# Altium PCB PCB1.PcbDoc
Units mm, origin at the board's own origin, x right, y up, seen from the top; angles counter-clockwise.
Board outline 80.77 x 44.7 mm, 2 copper layers (Top Layer, Bottom Layer); 14 components, 27 nets, 76 pads, 18 vias.
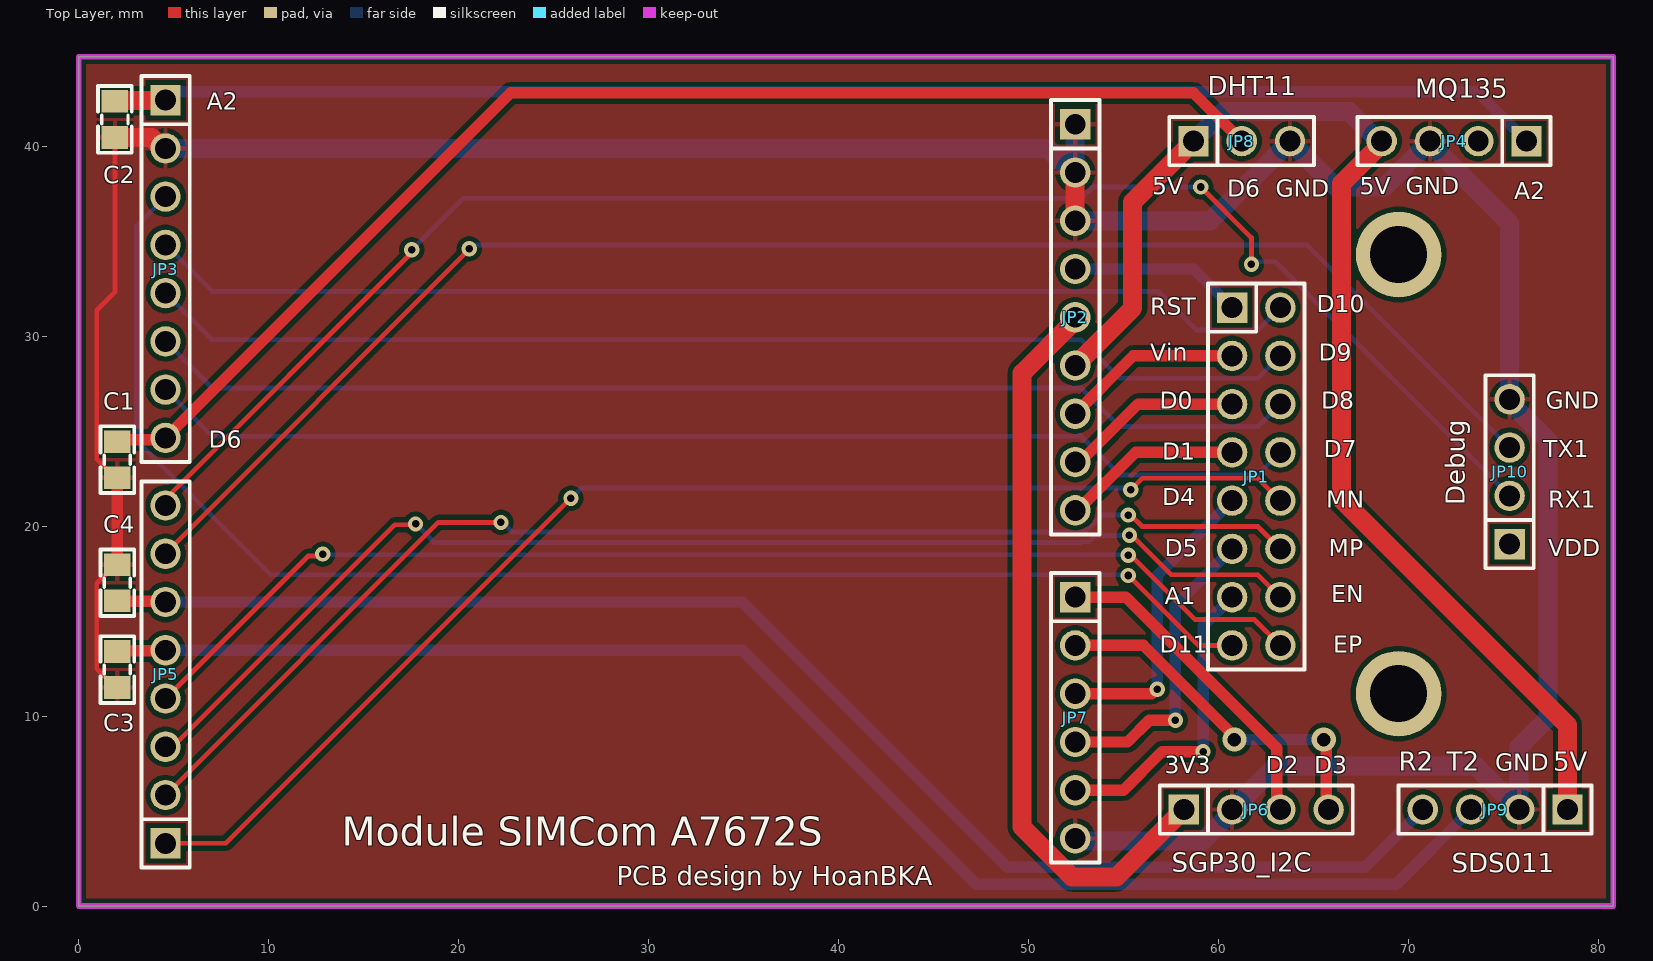
[diagram p0: Top Layer view]
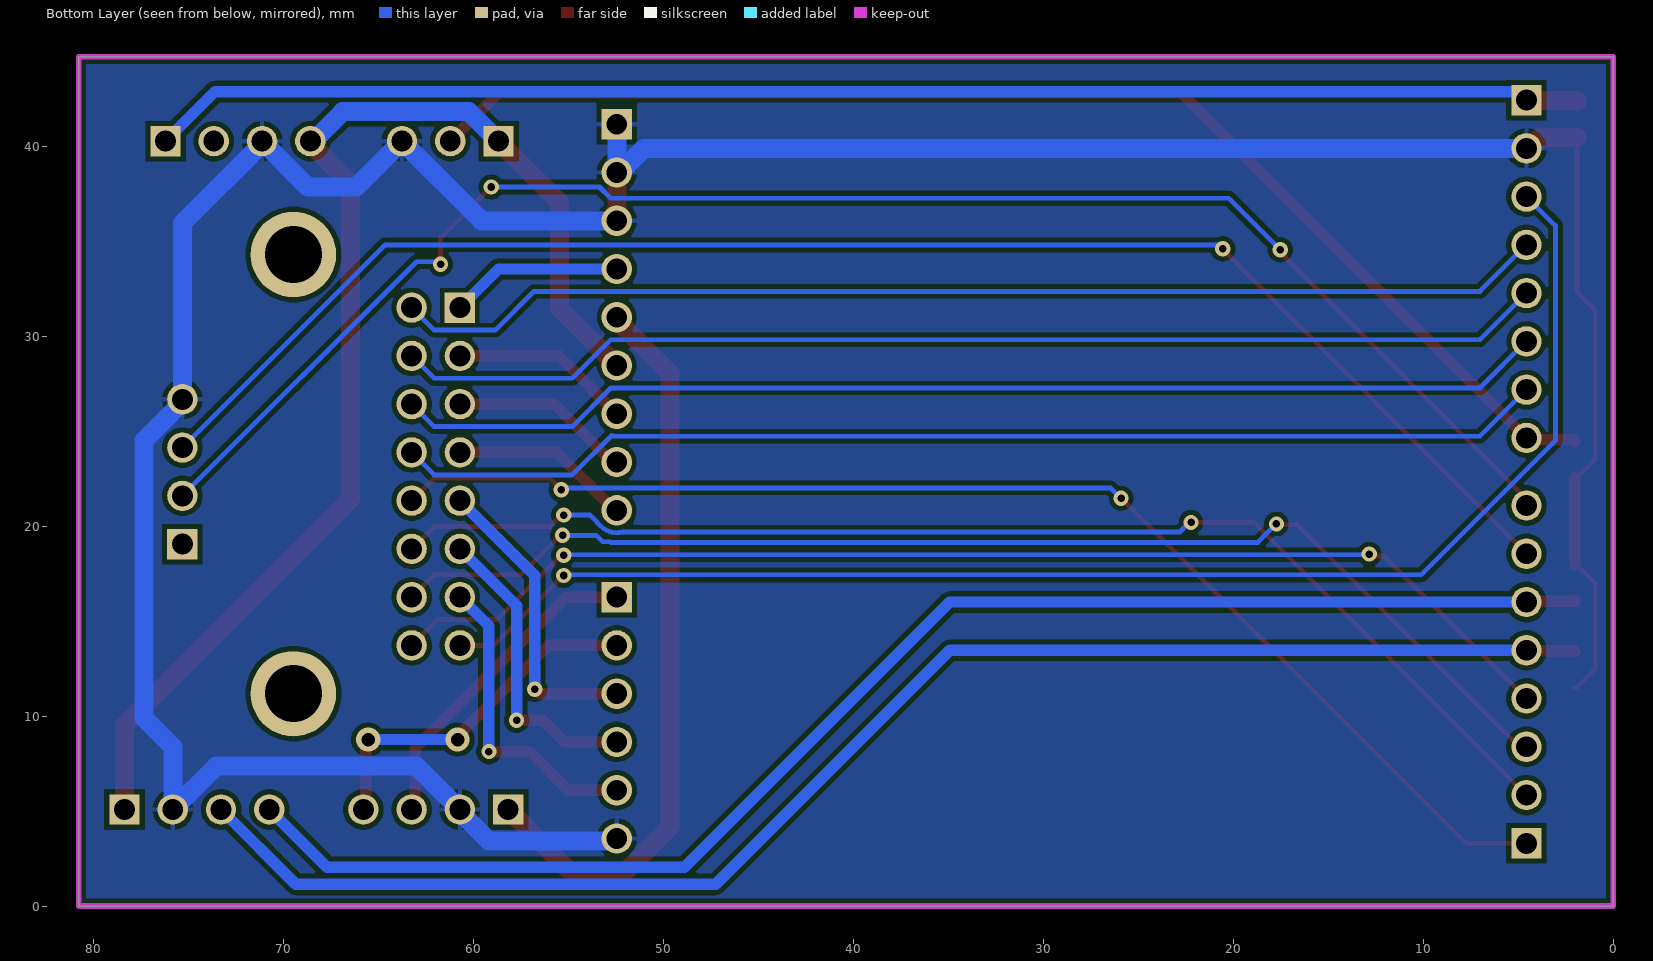
[diagram p1: Bottom Layer view, seen from below]
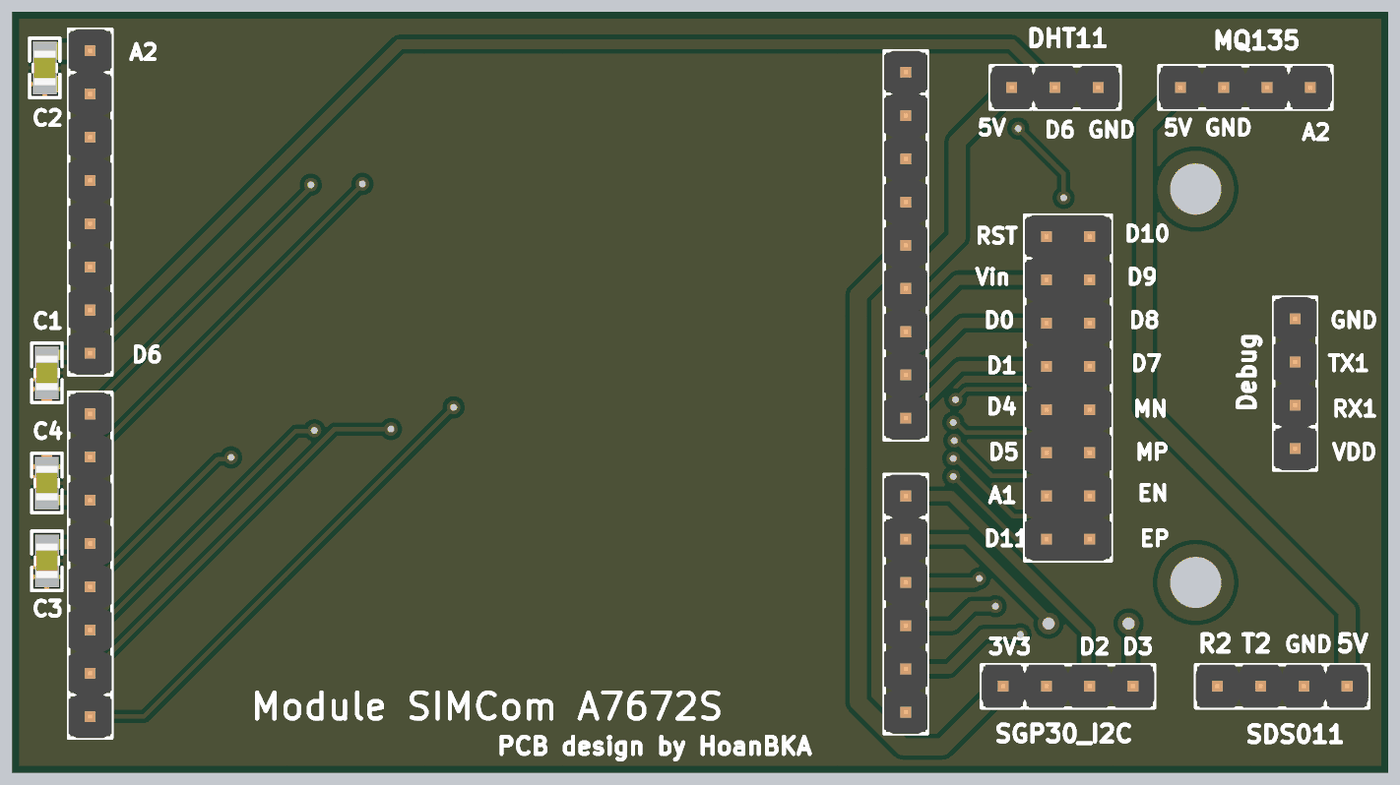
[diagram p2: 3D render of the assembled board from above, using the file's embedded part models]

## Layer stack, top to bottom
Top Solder: solder mask 0.0102, Solder Resist, Dk 3.5
Top Layer: signal copper 0.0356
Dielectric 1: dielectric 0.32, FR-4, Dk 4.8
Bottom Layer: signal copper 0.0356
Bottom Solder: solder mask 0.0102, Solder Resist, Dk 3.5

## Board outline
0,0 80.772,0 80.772,44.704 0,44.704

## Design rules (kind name [scope] priority, off if disabled: settings)
Clearance [All] p1: gap=0.254 ignorepadtopadclearanceinfootprint=FALSE except(0: Arc-Hole Track-Hole SMDPad-Hole THPad-Hole Via-Hole Fill-Hole Poly-Hole Region-Hole Text-Hole)
HoleSize [All] p1: absolutevalues=TRUE maxlimit=5 minlimit=0.025 maxpercent=80.000 minpercent=20.000
MinimumSolderMaskSliver [All] p1: minsoldermaskwidth=0
PolygonConnect [All] p1: connectstyle=Relief reliefconductorwidth=0.254 reliefentries=4 polygonreliefangle="90 Angle" airgapwidth=0.254
RoutingVias [All] p1: holewidth=0.4 width=0.8 viastyle="Through Hole" minholewidth=0.2 minwidth=0.4 maxholewidth=0.711 maxwidth=1.28
SilkToSilkClearance [All] p1: silktosilkclearance=0
SilkToSolderMaskClearance [IsPad] p1: minsilkscreentomaskgap=0 clearancetoexposedcopper=TRUE
SolderMaskExpansion [All] p1: expansion=0.102 istentingtop=FALSE
Width [All] p1: maxlimit=1 minlimit=0.254 preferedwidth=0.6
26 further rules are at their usual default settings.

## Components (designator, comment, footprint, x,y, rotation, side; value= is the part's Value field where it differs from the comment)
C1 "104" "tu 0805" 2.032,23.495 r270 top
C2 "104" "tu 0805" 1.905,41.402 r90 top
C3 "104" "tu 0805" 2.032,12.446 r90 top
C4 "104" "tu 0805" 2.032,17.018 r270 top
JP1 "JP 2x8 2.54" "JP 2x8 DT" 61.976,22.606 r270 top
JP2 "JP 1x9 2.54" "JP 1x9 DT" 52.451,41.148 r270 top
JP3 "JP 1x8 2.54" "JP 1x8 DT" 4.572,42.418 r270 top
JP4 "MQ135" "JP 1x4 DT" 76.2,40.259 r180 top
JP5 "JP 1x8 2.54" "JP 1x8 DT" 4.572,3.302 r90 top
JP6 "SGP30" "JP 1x4 DT" 58.166,5.08 r0 top
JP7 "JP 1x6 2.54" "JP 1x6 DT" 52.451,16.256 r270 top
JP8 "DHT11" "JP 1x3 DT" 58.674,40.259 r0 top
JP9 "JP 1x4 2.54" "JP 1x4 DT" 78.359,5.08 r180 top
JP10 "usb DEBUG" "JP 1x4 DT" 75.311,19.05 r90 top

## Footprints (in the part's own frame and the unit in brackets; to place one, negate y for a bottom-side part, rotate by r counter-clockwise, add the part's x,y. Pads: shape width x height; smd on the part's side, far side on the other; paste and mask are expansions set on the pad)
"JP 1x3 DT" [mm]
  rect 1.6x1.6 hole 1.1: 1(0,0)
  round 1.6 hole 1.1: 2(2.54,0) 3(5.08,0)
  silkscreen extent -1.27,-1.27 6.35,1.27, body extent -1.27,-1.27 6.35,1.27, height 8.54
"JP 1x4 DT" [mm] "4 pins, 1 row, straight, gold plating"
  rect 1.6x1.6 hole 1.1: 1(0,0)
  round 1.6 hole 1.1: 2(2.54,0) 3(5.08,0) 4(7.62,0)
  silkscreen extent -1.27,-1.27 8.89,1.27, body extent -1.27,-1.27 8.89,1.27, height 8.54
"JP 1x6 DT" [mm] "6 pins, 1 row, straight, gold plating"
  rect 1.6x1.6 hole 1.1: 1(0,0)
  round 1.6 hole 1.1: 2(2.54,0) 3(5.08,0) 4(7.62,0) 5(10.16,0) 6(12.7,0)
  silkscreen extent -1.27,-1.27 13.97,1.27, body extent -1.27,-1.27 13.97,1.27, height 8.54
"JP 1x8 DT" [mm] "8 pins, 1 row, straight, gold plating"
  rect 1.6x1.6 hole 1.1: 1(0,0)
  round 1.6 hole 1.1: 2(2.54,0) 3(5.08,0) 4(7.62,0) 5(10.16,0) 6(12.7,0) 7(15.24,0) 8(17.78,0)
  silkscreen extent -1.27,-1.27 19.05,1.27, body extent -1.27,-1.27 19.05,1.27, height 8.54
"JP 1x9 DT" [mm] "9 pins, 1 row, straight, gold plating"
  rect 1.6x1.6 hole 1.1: 1(0,0)
  round 1.6 hole 1.1: 2(2.54,0) 3(5.08,0) 4(7.62,0) 5(10.16,0) 6(12.7,0) 7(15.24,0) 8(17.78,0) 9(20.32,0)
  silkscreen extent -1.27,-1.27 21.59,1.27, body extent -1.27,-1.27 21.59,1.27, height 8.54
"JP 2x8 DT" [mm] "16 pins, dual pin, straight, gold plating"
  rect 1.6x1.6 hole 1.1: 1(-8.89,-1.27)
  round 1.6 hole 1.1: 2(-6.35,-1.27) 3(-3.81,-1.27) 4(-1.27,-1.27) 5(1.27,-1.27) 6(3.81,-1.27) 7(6.35,-1.27) 8(8.89,-1.27) 9(8.89,1.27) 10(6.35,1.27) 11(3.81,1.27) 12(1.27,1.27) 13(-1.27,1.27) 14(-3.81,1.27) 15(-6.35,1.27) 16(-8.89,1.27)
  silkscreen extent -10.16,-2.54 10.16,2.54, body extent -10.16,-2.54 10.16,2.54, height 8.55
"tu 0805" [mm]
  rect 1.2x1.4 smd: 1(-0.946,-0.003) 2(0.954,-0.003)
  silkscreen extent -1.75,-0.89 1.75,0.89, body extent -1.01,-0.64 1.01,0.63, height 0.61

## Part data
C1 C2 C3 C4: library part "Tu 0805 104 50V 10%", "Dán", Chung_Loai=Dán, Don_Vi=Con, Ma_Hang=MH004551, So_Chan=2, Ten_Linh_Kien="Tụ 0805 104-100nF 10% 50V"
JP1: library part "JP 2x8 2.54 Duc Thang", "Cắm", Chung_Loai=Cắm, Don_Vi=Con, Ma_Hang=MH002686, Ten_Linh_Kien="Jump Đôi Đực 2.54MM 2x40P Thẳng 11MM"
JP2: library part "JP 1x9 2.54 Duc Thang", "Cắm", Chung_Loai=Cắm, Don_Vi=Con, Ma_Hang=MH000903, Ten_Linh_Kien="Jump Đơn Đực 2.54MM 1x40P Thẳng 11MM"
JP3 JP5: library part "JP 1x8 2.54 Duc Thang", "Cắm", Chung_Loai=Cắm, Don_Vi=Con, Ma_Hang=MH000903, Ten_Linh_Kien="Jump Đơn Đực 2.54MM 1x40P Thẳng 11MM"
JP4 JP6 JP9 JP10: library part "JP 1x4 2.54 Duc Thang", "Cắm", Chung_Loai=Cắm, Don_Vi=Con, Ma_Hang=MH000903, Ten_Linh_Kien="Jump Đơn Đực 2.54MM 1x40P Thẳng 11MM"
JP7: library part "JP 1x6 2.54 Duc Thang", "Cắm", Chung_Loai=Cắm, Don_Vi=Con, Ma_Hang=MH000903, Ten_Linh_Kien="Jump Đơn Đực 2.54MM 1x40P Thẳng 11MM"
JP8: library part "JP 1x3 2.54 Duc Thang_1", "Cắm", Chung_Loai=Cắm, Don_Vi=Con, Ma_Hang=MH000903, Ten_Linh_Kien="Jump Đơn Đực 2.54MM 1x40P Thẳng 11MM"

## Free pads (board coordinates)
  round 4.5 hole 3 paste+0 mask+0.102: 3(69.469,34.29)
  round 4.5 hole 3 mask+0.102: 4(69.469,11.176)

## Via types
v1: diameter 0.8, hole 0.4, Top Layer to Bottom Layer, tented both sides, 16 vias
v2: diameter 1.27, hole 0.711, Top Layer to Bottom Layer, tented both sides, 2 vias

## Nets (pads, with @x,y where several pads share a name; then routed paths per layer and width w, separated by ;. In a path a pad name is that pad's centre, name@x,y a point inside that pad or via, vN(x,y) a via of type N, cw(c..) or ccw(c..) an arc to the next point about the centre after c; other vN are vias at no path point)
3V3: JP2.5 JP6.1 | length 39.1
  Top Layer w1: JP2.5 52.451,30.843 49.657,28.049 49.657,4.152 52.285,1.524 54.61,1.524 JP6.1
5V: JP2.6 JP4.4 JP8.1 JP9.1 | length 66.6
  Top Layer w1: JP2.6 55.47,31.467 55.47,37.055 JP8.1 ; JP4.4 68.58,40.132 66.465,38.017 66.465,21.419 78.359,9.525 JP9.1
  Bottom Layer w1: JP8.1 60.228,41.813 66.881,41.813 68.435,40.259 JP4.4
A1: JP1.7 JP7.5 | length 16.3
  Top Layer w0.6: JP7.5 54.991,6.096 57.023,8.128 v1(59.182,8.128)
  Bottom Layer w0.6: v1(59.182,8.128) 59.182,14.732 JP1.7
A2: C2.2 JP3.1 JP4.1 | length 75.6
  Top Layer w1: C2.2 1.939,42.387 4.541,42.387 JP3.1
  Bottom Layer w0.6: JP3.1 5.021,42.867 73.592,42.867 JP4.1
D0: JP1.3 JP2.8 | length 9.5
  Top Layer w0.6: JP2.8 52.705,23.368 55.753,26.416 JP1.3
D1: JP1.4 JP2.9 | length 9.5
  Top Layer w0.6: JP2.9 52.578,20.828 55.626,23.876 JP1.4
D2: JP6.3 JP7.1 | length 17.2
  Top Layer w0.6: JP7.1 55.118,16.256 63.055,8.319 63.055,5.271 JP6.3
D3: JP6.4 JP7.2 | length 19
  Top Layer w0.6: JP7.2 56.045,13.716 60.833,8.928 v2(60.833,8.763) ; v2(65.532,8.763) 65.659,8.636 65.659,5.207 JP6.4
  Bottom Layer w0.6: v2(60.833,8.763) v2(65.532,8.763)
D4: JP1.5 JP7.3 | length 16
  Top Layer w0.6: JP7.3 56.481,11.176 56.714,11.409 v1(56.769,11.409)
  Bottom Layer w0.6: v1(56.769,11.409) 56.769,17.399 JP1.5
D5: JP1.6 JP7.4 | length 16
  Top Layer w0.6: JP7.4 55.202,8.636 56.345,9.779 v1(57.723,9.779)
  Bottom Layer w0.6: v1(57.723,9.779) 57.723,15.813 JP1.6
D6: C1.1 JP3.8 JP8.2 | length 67.8
  Top Layer w0.6: C1.1 2.127,24.539 4.473,24.539 JP3.8 22.733,42.799 58.674,42.799 JP8.2
D7: JP1.13 JP3.7 | length 61
  Bottom Layer w0.254: JP3.7 7.023,24.727 52.451,24.727 ccw(c52.451,25.908) 52.729,24.76 54.794,22.695 62.065,22.695 JP1.13
D8: JP1.14 JP3.6 | length 61
  Bottom Layer w0.254: JP3.6 7.023,27.267 52.762,27.267 54.794,25.235 62.065,25.235 JP1.14
D9: JP1.15 JP3.5 | length 61
  Bottom Layer w0.254: JP3.5 7.023,29.807 52.762,29.807 54.794,27.775 62.065,27.775 JP1.15
D10: JP1.16 JP3.4 | length 61
  Bottom Layer w0.254: JP3.4 7.023,32.347 56.807,32.347 58.839,30.315 62.065,30.315 JP1.16
D11: JP1.8 JP3.3 | length 75.6
  Top Layer w0.254: v1(55.245,17.399) 58.928,13.716 JP1.8
  Bottom Layer w0.254: JP3.3 3.048,35.814 3.048,24.492 10.103,17.437 55.207,17.437 v1(55.245,17.399)
EN: JP1.10 JP5.3 | length 65.4
  Top Layer w0.254: JP5.3 4.936,8.382 5.327,8.773 5.344,8.773 16.637,20.066 17.691,20.066 v1(17.736,20.11) ; v1(55.301,19.511) 55.419,19.511 57.493,17.437 62.065,17.437 JP1.10
  Bottom Layer w0.254: v1(17.736,20.11) 18.707,19.139 52.769,19.139 52.807,19.177 53.189,19.177 53.522,19.511 v1(55.301,19.511)
EP: JP1.9 JP5.4 | length 63.8
  Top Layer w0.254: JP5.4 12.069,18.419 12.741,18.419 v1(12.846,18.523) ; v1(55.24,18.459) 55.375,18.459 58.759,15.075 61.887,15.075 JP1.9
  Bottom Layer w0.254: v1(12.846,18.523) 12.878,18.491 55.208,18.491 v1(55.24,18.459)
GND: C1.2 C2.1 C3.1 C4.1 JP2.1 JP2.2 JP2.3 JP3.2 JP4.3 JP6.2 JP7.6 JP8.3 JP9.2 JP10.4 | length 174.4
  Top Layer w0.254: C2.1 1.908,32.313 0.948,31.353 0.948,23.522 1.929,22.541 C1.2 ; C4.1 1.929,17.964 0.948,16.983 0.948,12.488 1.935,11.5 C3.1
  Top Layer w0.6: C4.1 C1.2
  Top Layer w1: C2.1 3.831,40.456 4.41,39.878 JP3.2 ; JP7.6 JP7.6@52.613,3.556 ; JP2.3 JP2.2 ; JP6.2@60.706,4.954 JP6.2
  Bottom Layer w1: JP3.2 51.019,39.878 52.289,38.608 JP2.2 JP2.1 ; JP7.6 52.613,3.556 52.74,3.429 59.181,3.429 60.706,4.954 JP6.2 62.992,7.366 73.533,7.366 JP9.2 75.819,8.382 77.343,9.906 77.343,24.493 75.311,26.525 75.311,35.941 71.12,40.132 JP4.3 68.707,37.846 66.167,37.846 JP8.3 59.563,36.068 JP2.3
MN: JP1.12 JP5.1 | length 67.2
  Top Layer w0.254: JP5.1 7.747,3.302 v1(25.908,21.463) ; v1(55.372,21.914) 55.975,22.517 62.065,22.517 JP1.12
  Bottom Layer w0.254: v1(25.908,21.463) 25.92,21.463 26.466,22.009 55.277,22.009 v1(55.372,21.914)
MP: JP1.11 JP5.2 | length 65.9
  Top Layer w0.254: JP5.2 18.923,20.193 v1(22.225,20.193) ; v1(55.245,20.574) 55.372,20.574 55.969,19.977 62.065,19.977 JP1.11
  Bottom Layer w0.254: v1(22.225,20.193) 22.313,20.193 22.821,19.685 52.154,19.685 ccw(c52.451,20.828) 53.286,19.992 53.718,20.425 53.867,20.574 v1(55.245,20.574)
R1: JP5.8 JP10.2 | length 85.6
  Top Layer w0.254: JP5.8 4.572,21.442 17.526,34.396 v1(17.526,34.544) ; v1(59.055,37.846) 61.722,35.179 v1(61.722,33.777)
  Bottom Layer w0.254: v1(17.526,34.544) 20.231,37.249 52.762,37.249 53.359,37.846 v1(59.055,37.846) ; v1(61.722,33.777) 61.854,33.909 62.992,33.909 JP10.2
R2: C4.2 JP5.6 JP9.4 | length 75.8
  Top Layer w0.6: C4.2 2.059,16.033 4.541,16.033 JP5.6
  Bottom Layer w0.6: JP5.6 34.925,16.002 48.895,2.032 67.691,2.032 JP9.4
RST: JP1.1 JP2.4 | length 9.1
  Bottom Layer w0.6: JP2.4 58.674,33.528 JP1.1
T1: JP5.7 JP10.3 | length 81.9
  Top Layer w0.254: JP5.7 4.572,18.576 20.554,34.558 v1(20.554,34.593)
  Bottom Layer w0.254: v1(20.554,34.593) 20.75,34.789 21.207,34.789 21.216,34.798 64.643,34.798 JP10.3
T2: C3.2 JP5.5 JP9.3 | length 78
  Top Layer w0.6: C3.2 2.066,13.431 4.541,13.431 JP5.5
  Bottom Layer w0.6: JP5.5 34.925,13.462 47.244,1.143 69.342,1.143 JP9.3
Vin: JP1.2 JP2.7 | length 9.5
  Top Layer w0.6: JP2.7 55.499,28.956 JP1.2
pads on no net: JP4.2 JP10.1

## Polygon pours and split planes (outlines as drawn)
GND on Top Layer "GND_L01_P000" (solid, pour order 0): 0,44.704 80.772,44.704 80.772,0 0,0
GND on Bottom Layer "GND_L02_P002" (solid, pour order 2): 0,44.704 80.772,44.704 80.772,0 0,0

## Keep-outs
Keep-Out Layer:
  the board outline again, w0.3

## Silkscreen, mask and mechanical layers (free items; w line width, h text height)
Top Overlay:
  text "DHT11" at 59.436,42.672 h1
  text "MQ135" at 70.358,42.545 h1
  text "A2" at 6.731,41.91 h0.9
  text "5V" at 56.515,37.465 h0.9
  text "5V" at 67.437,37.465 h0.9
  text "GND" at 69.85,37.465 h0.9
  text "D6" at 60.452,37.338 h0.9
  text "GND" at 62.992,37.338 h0.9
  text "A2" at 75.565,37.211 h0.9
  text "D10" at 65.151,31.242 h0.9
  text "RST" at 56.388,31.115 h0.9
  text "Vin" at 56.388,28.702 h0.9
  text "D9" at 65.278,28.702 h0.9
  text "D0" at 56.896,26.162 h0.9
  text "D8" at 65.405,26.162 h0.9
  text "GND" at 77.216,26.162 h0.9
  text "D6" at 6.858,24.13 h0.9
  text "D7" at 65.532,23.622 h0.9
  text "TX1" at 77.089,23.622 h0.9
  text "D1" at 57.023,23.495 h0.9
  text "D4" at 57.023,21.082 h0.9
  text "Debug" at 72.946,21.082 h1 r90
  text "MN" at 65.659,20.955 h0.9
  text "RX1" at 77.343,20.955 h0.9
  text "D5" at 57.15,18.415 h0.9
  text "MP" at 65.786,18.415 h0.9
  text "VDD" at 77.343,18.415 h0.9
  text "EN" at 65.913,16.002 h0.9
  text "A1" at 57.15,15.875 h0.9
  text "D11" at 56.896,13.335 h0.9
  text "EP" at 66.04,13.335 h0.9
  text "R2" at 69.469,7.112 h1
  text "T2" at 72.009,7.112 h1
  text "GND" at 74.549,7.112 h0.9
  text "5V" at 77.597,7.112 h1
  text "3V3" at 57.15,6.985 h0.9
  text "D2" at 62.484,6.985 h0.9
  text "D3" at 65.024,6.985 h0.9
  text "Module SIMCom A7672S" at 13.843,3.175 h1.52
  text "SGP30_I2C" at 57.531,1.818 h1
  text "SDS011" at 72.263,1.778 h1
  text "PCB design by HoanBKA" at 28.321,1.095 h1